# Altium PCB PCB1.PcbDoc
Units mil, origin at the board's own origin, x right, y up, seen from the top; angles counter-clockwise.
Board outline 3220 x 2140 mil, 2 copper layers (Top Layer, Bottom Layer); 27 components, 29 nets, 177 pads, 79 vias.
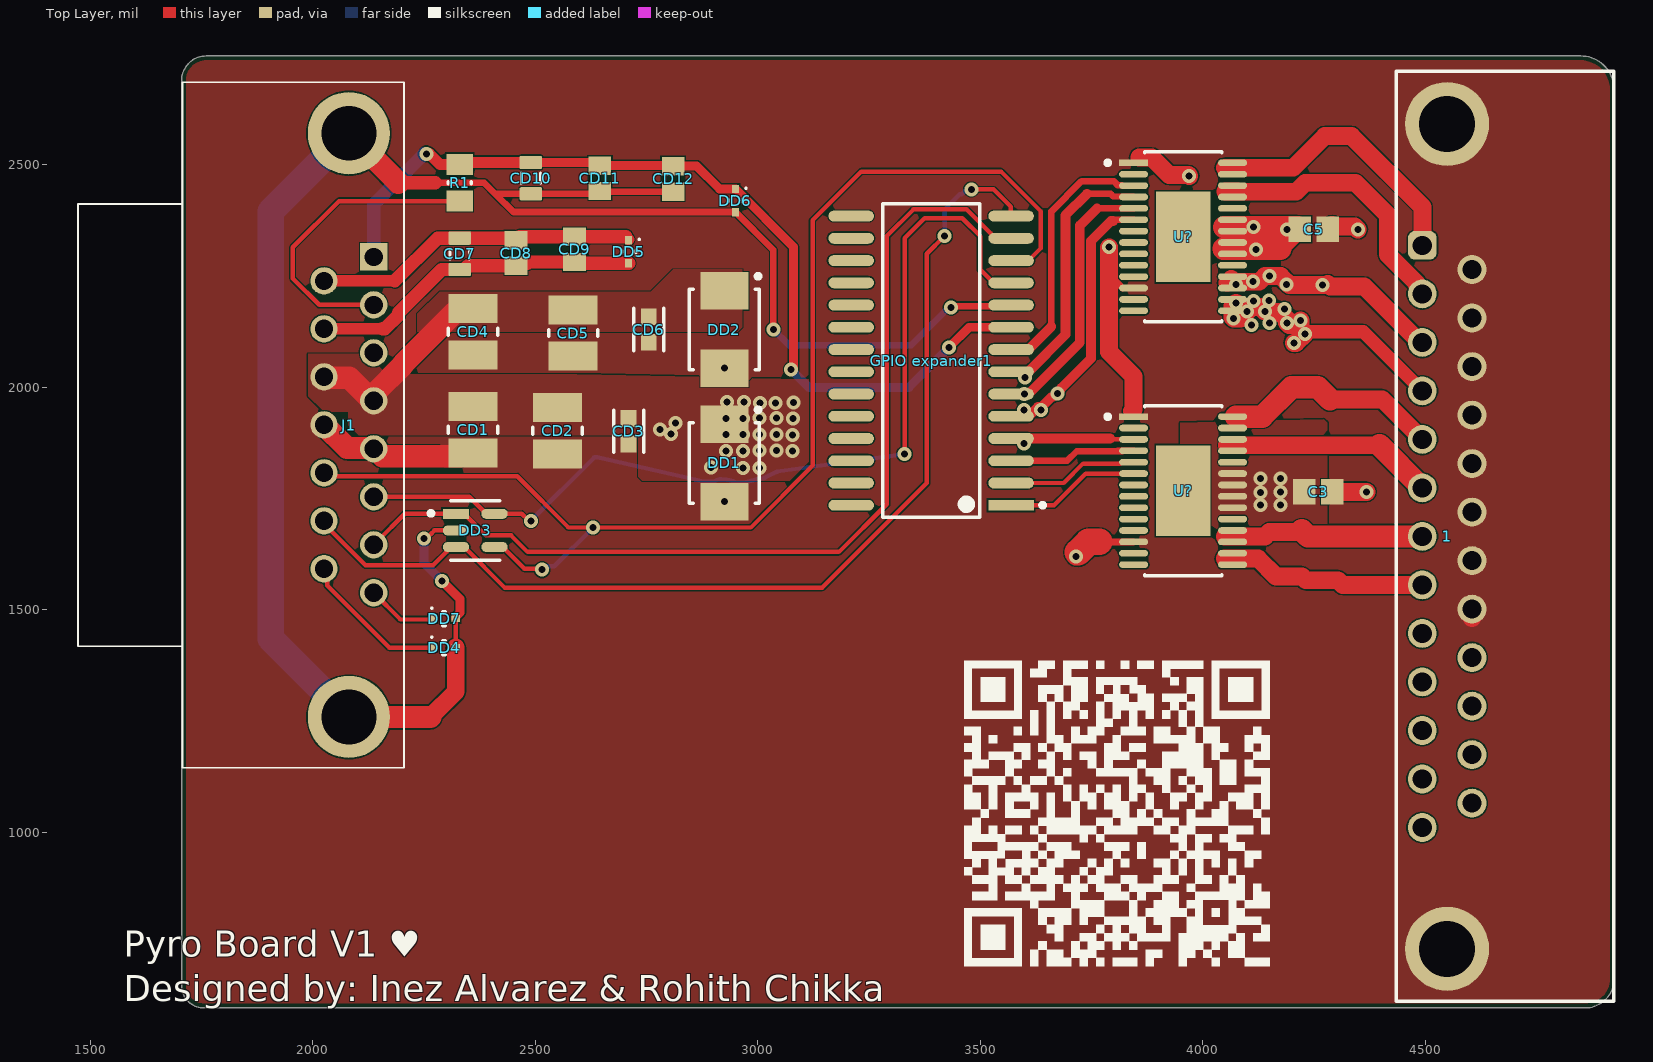
[diagram p0: Top Layer view]
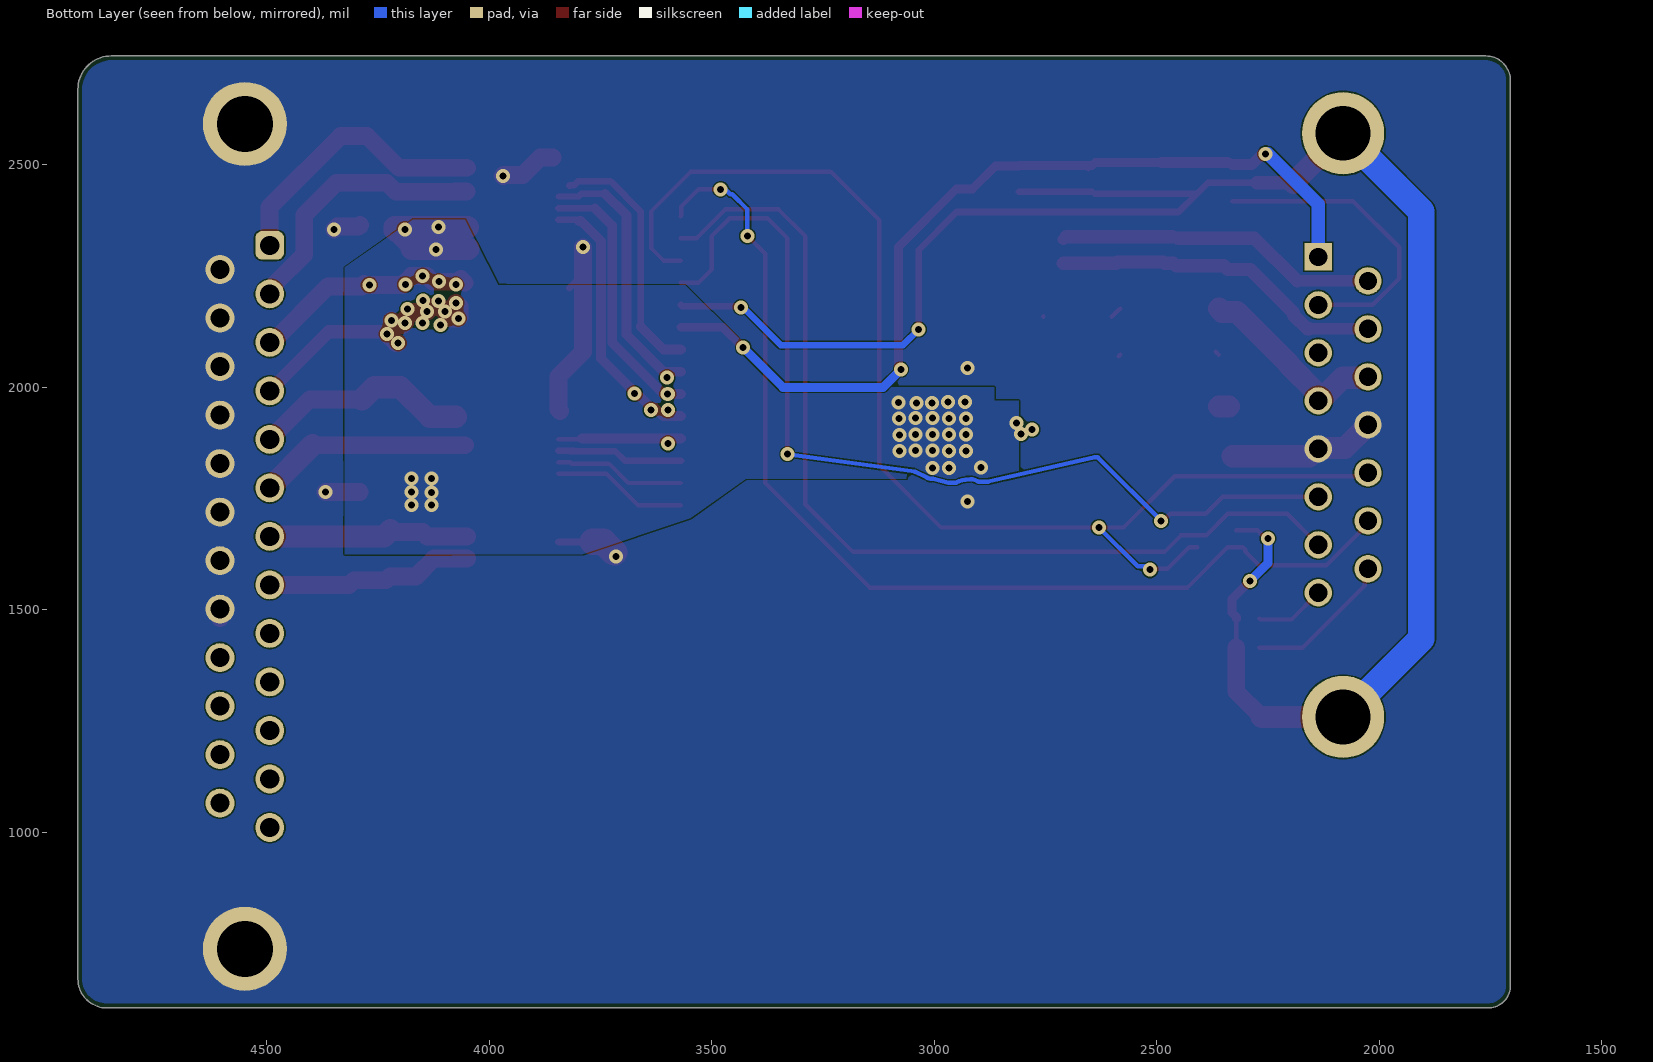
[diagram p1: Bottom Layer view, seen from below]
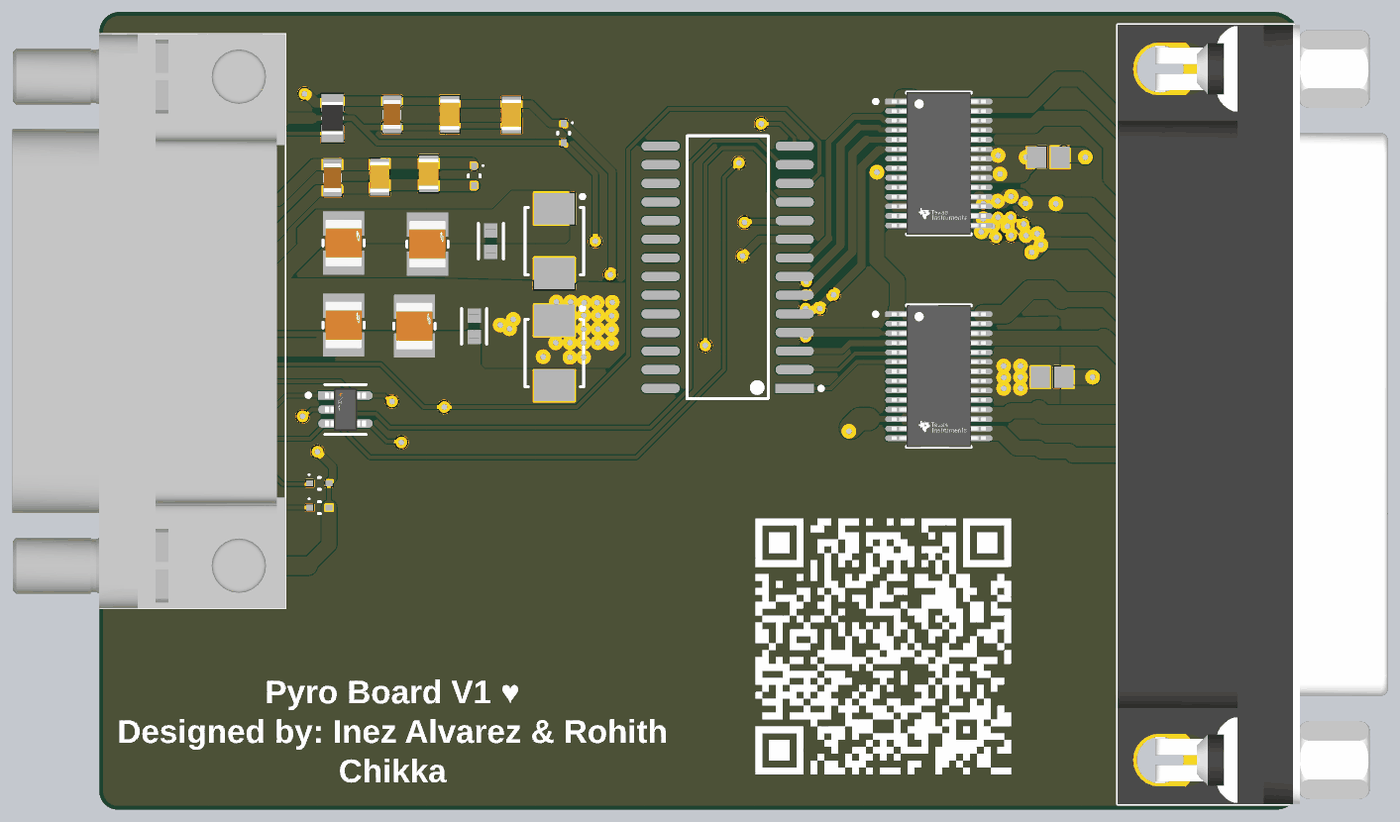
[diagram p2: 3D render of the assembled board from above, using the file's embedded part models]

## Layer stack, top to bottom
Top Solder: solder mask 0.4, Solder Resist, Dk 3.5
Top Layer: signal copper 1.4
Dielectric 1: dielectric 12.6, FR-4, Dk 4.8
Bottom Layer: signal copper 1.4
Bottom Solder: solder mask 0.4, Solder Resist, Dk 3.5

## Board outline
1705,655 ccw(c1755,655) 1755,605 4860,605 ccw(c4860,670) 4925,670 4925,2670 ccw(c4850,2670) 4850,2745 1760,2745 ccw(c1760,2690) 1705,2690

## Design rules (kind name [scope] priority, off if disabled: settings)
BoardOutlineClearance [All] p1: gap=10 ignorepadtopadclearanceinfootprint=FALSE except(0: Arc-SplitContinuation Track-SplitContinuation SMDPad-SplitContinuation THPad-SplitContinuation Via-SplitContinuation Fill-SplitContinuation Poly-SplitContinuation Region-SplitContinuation Text-SplitContinuation)
Clearance HVClearance [InNetClass('HV')] p1: gap=7.5 ignorepadtopadclearanceinfootprint=FALSE except(3: Arc-Text Track-Text SMDPad-Text THPad-Text Via-Text Fill-Text Poly-Text Region-Text Text-Text Text-Hole)
Clearance [All] p2: gap=3 ignorepadtopadclearanceinfootprint=FALSE
MinimumSolderMaskSliver [All] p1 off: minsoldermaskwidth=10
PolygonConnect [All] p1: connectstyle=Direct reliefconductorwidth=20 reliefentries=4 polygonreliefangle="90 Angle" airgapwidth=5
RoutingVias [All] p1: holewidth=28 width=50 viastyle="Through Hole" minholewidth=28 minwidth=50 maxholewidth=28 maxwidth=50 useviatemplates=TRUE
SilkToSolderMaskClearance [IsPad] p1 off: minsilkscreentomaskgap=10 clearancetoexposedcopper=TRUE
SolderMaskExpansion [All] p1: expansion=4 istentingtop=FALSE
SupplyNets "Schematic Supply Nets_1" [InNet('3V3GND')] p1: voltage=0.000
Width [All] p1: maxlimit=1000 minlimit=10 preferedwidth=20 minimp=50.000000 maximp=50.000000 favimp=50.000000
28 further rules are at their usual default settings.

## Classes and differential pairs
component class "Standard DSUB": CD1 CD2 CD3 CD4 CD5 CD6 CD7 CD8 CD9 CD10 CD11 CD12 DD1 DD2 DD3 DD4 DD5 DD6 DD7 DSUb J1 R1

## Components (designator, comment, footprint, x,y, rotation, side; value= is the part's Value field where it differs from the comment)
1 "618025231121" 618025231121 4679.69,1665 r90 top
C3 "1pf" CAPC2013X140X50NL20T25 4260,1765 r0 top
C5 "1pf" CAPC2013X140X50NL20T25 4249.69,2355 r0 top
CD1 "CL32B106KMVNNWE" FP-CL32-IPC_B 2360,1905 r270 top value=10µF
CD2 "CL32B106KMVNNWE" FP-CL32-IPC_B 2550,1902.18 r270 top value=10µF
CD3 "CL10B104KC8NNNC" FP-CL10-IPC_B 2710,1901.38 r270 top value=100nF
CD4 "CL32B106KMVNNWE" FP-CL32-IPC_B 2360,2125 r270 top value=10µF
CD5 "CL32B106KMVNNWE" FP-CL32-IPC_B 2585,2122.17 r270 top value=10µF
CD6 "CL10B104KC8NNNC" FP-CL10-IPC_B 2755,2130 r270 top value=100nF
CD7 "Capacitor 22µF +/-40% 16V 0805" CAPC0805(2012)145_L 2330,2300 r270 top value=22µF
CD8 "Capacitor 100 nF +/-10% 50 V 0805" CAPC2013X95X50LL10T25 2456.73,2301.71 r270 top value=100nF
CD9 "Capacitor 100 nF +/-10% 50 V 0805" CAPC2013X95X50LL10T25 2588.32,2310.24 r270 top value=100nF
CD10 "Capacitor 22µF +/-40% 16V 0805" CAPC0805(2012)145_L 2490,2470 r270 top value=22µF
CD11 "Capacitor 100 nF +/-10% 50 V 0805" CAPC2013X95X50LL10T25 2645,2470 r270 top value=100nF
CD12 "Capacitor 100 nF +/-10% 50 V 0805" CAPC2013X95X50LL10T25 2810,2468.54 r270 top value=100nF
DD1 "1SMB48AT3G" ONSC-SMB-2-403A-03_H_V 2925,1830 r270 top
DD2 "1SMB48AT3G" ONSC-SMB-2-403A-03_H_V 2925,2130 r270 top
DD3 "ESDS304DBVR" FP-DBV0005A-IPC_B 2365,1678.33 r0 top
DD4 "ESD5Z3.3T1G" ONSC-SOD-523-2-502-01_V 2295,1415 r0 top
DD5 "ESD5Z5.0T1G" ONSC-SOD-523-2-502-01_V 2710,2305 r270 top
DD6 "ESD5Z3.3T1G" ONSC-SOD-523-2-502-01_V 2950,2420 r270 top
DD7 "ESD5Z3.3T1G" ONSC-SOD-523-2-502-01_V 2295,1480 r0 top
"GPIO expander1" "MCP23S17T-E/SO" FP-C04-052-IPC_A 3389.74,2060 r180 top
J1 "5747236-6_1" 57472366 2136.81,2293.31 r90 top
R1 "Resistor 10k +/-1% 0805 125 mW" RESC2013X50X35ML15T15 2330,2460 r270 top value=10k
U? "TPS4H160AQPWPRQ1" FP-PWP0028C-IPC_B 3956.24,2338.39 r0 top (schematic designator MOSFET1)
U? "TPS4H160AQPWPRQ1" FP-PWP0028C-IPC_B 3956.24,1767.8 r0 top (schematic designator MOSFET2)

## Footprints (in the part's own frame and the unit in brackets; to place one, negate y for a bottom-side part, rotate by r counter-clockwise, add the part's x,y. Pads: shape width x height; smd on the part's side, far side on the other; paste and mask are expansions set on the pad)
57472366 [mm]
  rect 1.56x1.56 hole 1.04: 1(0,0)
  round 1.56 hole 1.04: 2(-2.74,0) 3(-5.48,0) 4(-8.22,0) 5(-10.96,0) 6(-13.7,0) 7(-16.44,0) 8(-19.18,0) 9(-1.37,2.84) 10(-4.11,2.84) 11(-6.85,2.84) 12(-9.59,2.84) 13(-12.33,2.84) 14(-15.07,2.84) 15(-17.81,2.84)
  round 4.695 hole 3.13: MH1(7.06,1.42) MH2(-26.27,1.42)
  silkscreen extent -29.17,-1.73 9.97,16.89, body extent -29.18,-1.72 9.98,16.88, height 12.49
618025231121 [mm] "25 pins, right angled, 8.08mm, with hex screw"
  rrect50% 1.65x1.65 hole 1.09: 1(16.62,4.72)
  round 1.65 hole 1.09: 2(13.85,4.72) 3(11.08,4.72) 4(8.31,4.72) 5(5.54,4.72) 6(2.77,4.72) 7(0,4.72) 8(-2.77,4.72) 9(-5.54,4.72) 10(-8.31,4.72) 11(-11.08,4.72) 12(-13.85,4.72) 13(-16.62,4.72) 14(15.235,1.88) 15(12.465,1.88) 16(9.695,1.88) 17(6.925,1.88) 18(4.155,1.88) 19(1.385,1.88) 20(-1.385,1.88) 21(-4.155,1.88) 22(-6.925,1.88) 23(-9.695,1.88) 24(-12.465,1.88) 25(-15.235,1.88)
  round 4.8 hole 3.2: M1(-23.55,3.3) M2(23.55,3.3)
  silkscreen extent -26.55,-6.2 26.55,6.2, body extent -26.55,-12.2 26.55,6.2, height 12.55
CAPC0805(2012)145_L [mm] "Chip Capacitor, Body 2.0x1.2mm, Height 1.45mm, IPC High Density"
  rrect25% 0.76x1.3 smd: 1(-0.9,0) 2(0.89,0)
  silkscreen extent -0.3,-0.55 0.3,0.55, body extent -1,-0.6 1,0.6, height 1.45
CAPC2013X95X50LL10T25 [mm] "Chip Capacitor, 2-Leads, Body 2.10x1.35mm, IPC High Density"
  rect 1.05x1.3 smd: 1(-0.725,0) 2(0.725,0)
  body extent -1.05,-0.67 1.05,0.67, height 0.95
CAPC2013X140X50NL20T25 [mm] "Chip Capacitor, 2-Leads, Body 2.00x1.25mm, IPC Medium Density"
  rect 1.3x1.45 smd: 1(-0.8,0) 2(0.8,0)
  body extent -1.1,-0.72 1.1,0.72, height 1.4
FP-C04-052-IPC_A [mil]
  rect 102.47x24.49 smd paste+0 mask+0: 1(-179.74,325)
  rrect100% 102.47x24.49 smd paste+0 mask+0: 2(-179.74,275) 3(-179.74,225) 4(-179.74,175) 5(-179.74,125) 6(-179.74,75) 7(-179.74,25) 8(-179.74,-25) 9(-179.74,-75) 10(-179.74,-125) 11(-179.74,-175) 12(-179.74,-225) 13(-179.74,-275) 14(-179.74,-325) 15(179.74,-325) 16(179.74,-275) 17(179.74,-225) 18(179.74,-175) 19(179.74,-125) 20(179.74,-75) 21(179.74,-25) 22(179.74,25) 23(179.74,75) 24(179.74,125) 25(179.74,175) 26(179.74,225) 27(179.74,275) 28(179.74,325)
  silkscreen extent -256,-352 109,352
FP-CL10-IPC_B [mil]
  rect 37.72x35.91 smd paste+0 mask+0: 1(-28.62,0) 2(28.62,0)
  silkscreen extent -47,-34 47,34, body extent -57,-28 57,28, height 10
FP-CL32-IPC_B [mil]
  rect 65.06x110.4 smd paste+0 mask+0: 1(-52.18,0) 2(52.17,0)
  silkscreen extent -8,-55 8,55, body extent -95,-65 95,65, height 10
FP-DBV0005A-IPC_B [mm]
  rect 1.505x0.572 smd paste+0 mask+0: 1(-1.1,0.95)
  rrect100% 1.505x0.572 smd paste+0 mask+0: 2(-1.1,0) 3(-1.1,-0.95) 4(1.1,-0.95) 5(1.1,0.95)
  silkscreen extent -2.65,-1.7 1.4,1.7, body extent -2.1,-1.7 2.1,1.7, height 0.25
FP-PWP0028C-IPC_B [mm]
  rect 1.655x0.381 smd paste+0 mask+0: 1(-2.825,4.225)
  rrect100% 1.655x0.381 smd paste+0 mask+0: 2(-2.825,3.575) 3(-2.825,2.925) 4(-2.825,2.275) 5(-2.825,1.625) 6(-2.825,0.975) 7(-2.825,0.325) 8(-2.825,-0.325) 9(-2.825,-0.975) 10(-2.825,-1.625) 11(-2.825,-2.275) 12(-2.825,-2.925) 13(-2.825,-3.575) 14(-2.825,-4.225) 15(2.825,-4.225) 16(2.825,-3.575) 17(2.825,-2.925) 18(2.825,-2.275) 19(2.825,-1.625) 20(2.825,-0.975) 21(2.825,-0.325) 22(2.825,0.325) 23(2.825,0.975) 24(2.825,1.625) 25(2.825,2.275) 26(2.825,2.925) 27(2.825,3.575) 28(2.825,4.225)
  rect 3.1x5.18 smd paste-1000 mask+0: 29(0,0)
  silkscreen extent -4.43,-4.85 2.2,4.85, body extent -3.9,-5.1 3.9,5.1, height 0.25
ONSC-SMB-2-403A-03_H_V [mil] "Molded, 2-Leads, Body 4.6x3.95mm"
  rect 85x107.99 smd: 1(-87.01,0) 2(87.01,0)
  silkscreen extent -125,-79 91,81, body extent -91,-78 91,78, height 95
ONSC-SOD-523-2-502-01_V [mm] "SOD, 2-Leads, Body 1.2x0.8mm"
  rect 0.48x0.4 smd: 1(-0.66,0) 2(0.66,0)
  silkscreen extent -0.75,-0.4 0.07,0.65, body extent -0.6,-0.4 0.6,0.4, height 0.7
RESC2013X50X35ML15T15 [mm] "Chip Resistor, 2-Leads, Body 2.2x1.4mm, IPC Low Density"
  rect 1.2x1.5 smd: 1(-1.05,0) 2(1.05,0)
  silkscreen extent -0.05,-0.65 0.05,0.65, body extent -1.1,-0.7 1.1,0.7, height 0.5

## Part data
1: library part CMP-1502-00202-2, Contact Resistance=30mΩ, Current Rating=3A, Insulation Resistance=5GΩ, Max Operating Temperature=105°C, Min Operating Temperature=-55°C, Operating Supply Voltage=125V, Contact Plating=Gold, Depth=18.5mm, Gender=Female, Housing Material=Steel, Insulation Material=PBT, Length=38.33mm, Mount="Through Hole", NexarPartId=18818207, Number Of Contacts=25, Number of Pins=25, Number of Rows=2, Orientation="Right Angle", Pitch=2.77mm, REACH SVHC=Unknown, RoHS=Compliant, Termination=SMD/SMT, Voltage Rating=125V, Width=12.5mm
C3 C5: library part CMP-2007-04531-1, Manufacturer="AVX Interconnect / Elco", Part Number=08051A181FAT2A
CD1 CD2 CD4 CD5: library part CMP-001-00107-1, "Ceramic Capacitor, Multilayer, Ceramic, 63V, 10% +Tol, 10% -Tol, X7R, 15% TC, 10uF, Surface Mount, 1210", Capacitor Type=Ceramic, Case/Package=1210, Max Operating Temperature=125°C, Min Operating Temperature=-55°C, Mounting Technology="Surface Mount", Pins=2, RoHS Compliant=Yes
CD3 CD6: library part CMP-001-00108-1, "Ceramic Capacitor, Multilayer, Ceramic, 100V, 10% +Tol, 10% -Tol, X7R, 15% TC, 0.1uF, Surface Mount, 0603", Capacitor Type=Ceramic, Case/Package=0603, Max Operating Temperature=125°C, Min Operating Temperature=-55°C, Mounting Technology="Surface Mount", Pins=2, RoHS Compliant=Yes
CD7 CD10: library part CMP-001-00081-4, "Chip Capacitor, 22µF +/-40%, 16V, 0805, Thickness 1.45 mm", Case/Package=0805, Max Operating Temperature=85°C, Min Operating Temperature=-55°C, Tolerance=5%, Voltage Rating=16V, Mounting Technology=SMT, Pins=2
CD8 CD9 CD11 CD12: library part CMP-001-00018-6, "Chip Capacitor, 100 nF, +/- 10%, 50 V, 0805 (2012 Metric)", Capacitor Type=Ceramic, Case/Package=0805, Max Operating Temperature=125°C, Min Operating Temperature=-55°C, Tolerance=10%, Voltage Rating=50V, Mounting Technology=SM, Pins=2, RoHS Compliant=True
DD1 DD2: library part CMP-004-00036-1, "Trans Voltage Suppressor Diode, 600W, 48V V(RWM), Unidirectional, 1 Element, Silicon, DO-214AA", Max Operating Temperature=150°C, Min Operating Temperature=-65°C, Pins=2, RoHS Compliant=Yes
DD3: library part CMP-004-00037-1, "Trans Voltage Suppressor Diode, 85W, 3.6V V(RWM), Unidirectional, 4 Element, Silicon", RoHS Compliant=Yes
DD4 DD6 DD7: library part CMP-004-00034-1, "Trans Voltage Suppressor Diode, 158W, 3.3V V(RWM), Unidirectional, 1 Element, Silicon", Max Operating Temperature=150°C, Min Operating Temperature=-55°C, Pins=2, RoHS Compliant=Yes
DD5: library part CMP-004-00035-1, "Trans Voltage Suppressor Diode, 240W, 5V V(RWM), Unidirectional, 1 Element, Silicon", Max Operating Temperature=150°C, Min Operating Temperature=-55°C, Pins=2, RoHS Compliant=Yes
"GPIO expander1": library part CMP-0186-00131-3, "IC I/O EXPANDER SPI 16B 28SOIC", Case/Package=SOIC, Frequency=10MHz, Max Operating Temperature=125°C, Max Supply Voltage=5.5V, Min Operating Temperature=-40°C, Min Supply Voltage=4.5V, Nominal Supply Current=1mA, Package Quantity=1600, Power Dissipation=700mW, Interface=SPI, Lead Free="Lead Free", Max Frequency=10MHz, Mount="Surface Mount", Number of Bits=16, Number of Channels=1, Number of I/Os=16, Number of Pins=28, Packaging="Tape and Reel", REACH SVHC="No SVHC"
J1: library part CMP-031-000002-4, "Male 15 pin DSUB, Used for Hotfire Modules - can connect to Hotfire main board", Arrow Part Number=5747236-6, Manufacturer_Name="TE Connectivity", Mouser Part Number=571-5747236-6, Arrow Price/Stock=https://www.arrow.com/en/products/5747236-6/te-connectivity, Datasheet Link=https://www.te.com/commerce/DocumentDelivery/DDEController?Action=srchrtrv&DocNm=82068_AMPLIMITE_Right-Angle_Posted_Conn&DocType=Catalog%20Section&DocLang=English&PartCntxt=5747236-6&DocFormat=pdf, Design Item ID=5747236-6_1, Height=12.93mm, Manufacturer_Part_Number=5747236-6, Mouser Price/Stock=https://www.mouser.co.uk/ProductDetail/TE-Connectivity/5747236-6?qs=2De2tSDgB03zVLI%252B5IT1Bw%3D%3D, Source=SamacSys.SchLib
R1: library part CMP-009-00018-5, "Chip Resistor, 10 KOhm, +/- 1%, 125 mW, -55 to 155 degC, 0805 (2012 Metric)", Case/Package=0805, Max Operating Temperature=155°C, Min Operating Temperature=-55°C, Power=125mW, Tolerance=1%, Voltage Rating=150V, Mounting Technology=SM, Pins=2, RoHS Compliant=True
U? U?: library part CMP-019-00059-1, "Buffer/Inverter Based Peripheral Driver, 2.5A, PDSO28", Case/Package=TSSOP, Max Operating Temperature=125°C, Max Supply Voltage=40V, Min Operating Temperature=-40°C, Min Supply Voltage=4V, Pins=28, RoHS Compliant=Yes

## Via types
v1: diameter 31.5, hole 15.75, Top Layer to Bottom Layer, 79 vias

## Nets (pads, with @x,y where several pads share a name; then routed paths per layer and width w, separated by ;. In a path a pad name is that pad's centre, name@x,y a point inside that pad or via, vN(x,y) a via of type N, cw(c..) or ccw(c..) an arc to the next point about the centre after c; other vN are vias at no path point)
3.3V: "GPIO expander1.9" CD10.1 CD11.1 CD12.1 DD6.1 J1.1 R1.1 | length 2045.5
  Top Layer w0: R1.1@2329.51,2501.34 2329.76,2501.09 R1.1
  Top Layer w10: CD11.1@2638.11,2505.43 CD11.1 CD11.1@2653.54,2490 ; CD12.1@2808.55,2498.54 2809.27,2497.82 CD12.1
  Top Layer w20: CD10.1 CD11.1@2638.11,2505.43 ; CD11.1 2653.54,2498.54 CD12.1@2808.55,2498.54 ; CD12.1@2809.27,2497.82 2862.18,2497.82 2914.02,2445.98 DD6.1 3080,2315.98 3080,2045 v1(3075,2040) ; v1(3430,2090) 3475,2135 3569.49,2135
  Top Layer w25: v1(2255,2525) 2261.76,2525 2285.67,2501.09 R1.1@2329.76,2501.09 ; R1.1@2340,2505.43 CD10.1
  Bottom Layer w10: v1@2250,2525 v1(2255,2525)
  Bottom Layer w20: v1(3075,2040) 3115,2000 3340,2000 v1(3430,2090)
  Bottom Layer w30: J1.1 2136.81,2411.81 v1@2250,2525
3V3GND: "GPIO expander1.10" CD10.2 CD11.2 CD12.2 DD3.2 DD4.2 DD6.2 DD7.2 J1.MH1 J1.MH2 | length 4394.7
  Top Layer w10: J1.MH1 J1.MH1@2114.36,2537.81 ; 2265,1670 2273.33,1678.33 DD3.2 ; DD4.2 DD7.2 ; CD11.2@2638.51,2434.96 CD11.2 CD11.2@2646.46,2440
  Top Layer w15: 2275,2460 2385,2460 2410.04,2434.96 ; CD11.2@2638.51,2434.96 CD10.2 2410.04,2434.96 ; CD11.2@2646.46,2440 CD12.2 ; v1(3035,2130) 3035,2309.02 DD6.2 2450.98,2394.02 2410.04,2434.96 ; v1(3435,2180) 3437.5,2182.5 3566.99,2182.5 3569.49,2185
  Top Layer w20: v1(2290,1565) 2330.98,1524.02 2330.98,1493.86 2320.98,1483.86 DD7.2
  Top Layer w30: 2192.17,2460 2275,2460
  Top Layer w40: 2264.06,1259.06 2320.98,1315.98 DD4.2
  Top Layer w50: J1.MH2 2264.06,1259.06 ; J1.MH1@2114.36,2537.81 2192.17,2460
  Bottom Layer w15: v1(3035,2130) 3070,2095 3345,2095 3430,2180 v1(3435,2180)
  Bottom Layer w20: v1(2250,1660) 2250,1605 v1(2290,1565)
  Bottom Layer w60: J1.MH2 1905,1434.96 1905,2395.35 J1.MH1
5V: CD7.1 CD8.1 CD9.1 DD5.1 J1.9 | length 734.6
  Top Layer w10: CD8.1@2451.55,2335.43 CD8.1 CD8.1@2465.26,2338.79 ; DD5.1 DD5.1@2710,2332.56
  Top Layer w25: DD5.1@2703.77,2338.79 DD5.1@2710,2332.56
  Top Layer w26: J1.9 2184.37,2239.37
  Top Layer w30: 2184.37,2239.37 2280.43,2335.43 CD7.1 CD8.1@2451.55,2335.43 ; CD8.1@2465.26,2338.79 CD9.1 DD5.1@2703.77,2338.79
5VGND: CD7.2 CD8.2 CD9.2 DD5.2 J1.10 | length 751.4
  Top Layer w10: CD9.2 CD9.2@2591,2279.02
  Top Layer w26: J1.10 2156.5,2131.5
  Top Layer w30: 2156.5,2131.5 2161.66,2131.5 2192.52,2162.36 2192.52,2167.52 2289.96,2264.96 CD7.2 2340.55,2264.96 2348.76,2273.17 CD8.2 2462.4,2278.84 2482.03,2278.84 2484.89,2281.7 CD9.2 ; CD9.2@2591,2279.02 DD5.2
CLK: "GPIO expander1.12" DD3.4 J1.13 | length 2796.9
  Top Layer w10: J1.13 2032.87,1800 2459.55,1800 2574.55,1685 v1(2630,1685) 2984.72,1685 3123.3,1823.58 3123.3,2375.82 3232.48,2485 3547.01,2485 3635.72,2396.29 3635.72,2312.25 3608.48,2285 3569.49,2285 ; DD3.4 2426.69,1640.92 2475,1592.62 2512.38,1592.62 v1(2515,1590)
  Bottom Layer w10: v1(2515,1590) 2522.65,1597.65 2542.65,1597.65 v1(2630,1685)
CS: "GPIO expander1.11" DD3.5 J1.6 | length 2118.7
  Top Layer w10: J1.6 2351.75,1753.94 2389.96,1715.73 DD3.5 2469.27,1715.73 2475,1710 ; v1(3330,1850) 3330,2335 3375,2380 3460,2380 3500,2340 3500,2265 3530,2235 3569.49,2235
  Bottom Layer w10: v1(2490,1700) 2629.72,1839.72 2632.65,1842.65 2639.87,1842.65 2878.89,1788.19 2901.11,1788.19 2913.94,1793.84 2918.56,1793.84 2929.77,1792.76 cw(c2925,1742.99) 2950.85,1785.79 2968.58,1785.79 3002.72,1794.45 ccw(c3004.88,1819.22) 3015.92,1796.94 3043.83,1810.74 v1(3330,1850)
GPIO1: DD4.1 J1.15 | length 335.2
  Top Layer w10: J1.15 2032.12,1585.01 2032.12,1554.6 2171.72,1415 DD4.1
GPIO2: DD7.1 J1.8 | length 157.8
  Top Layer w10: J1.8 2196.81,1478.19 2267.21,1478.19 DD7.1
HPGROUND: 1.14 1.15 1.16 1.17 1.18 1.19 1.20 1.21 1.M1 1.M2 C3.2 C5.2 CD1.2 CD2.2 CD3.2 CD4.2 CD5.2 CD6.2 DD1.2 DD2.2 J1.5 J1.12 U?.1 U?.12 | length 1299.3
  Top Layer w10: J1.5@2135.07,1863.56 J1.5 ; CD4.2 CD4.2@2367.17,2080 ; CD5.2@2582.17,2072.83 CD5.2
  Top Layer w15: v1(3790,2315) 3790,2310.54 3801.91,2298.62 3801.91,2266.96 3801.91,2256.27 ; 3801.91,2241.36 3801.91,2241.23 U?.12@3819.91,2223.23 ; C5.2 C5.2@4291.18,2365
  Top Layer w16: 3767.64,1652.64 U?.12@3845,1652.64
  Top Layer w40: J1.12 J1.12@2030.8,1915.75 ; v1(3715,1620) 3715,1622.71 3720,1627.71 v1@3720,1629.21 ; v1(3790,2315) 3789.41,2314.41 3789.41,2261.45 3789.41,2080.14 3845,2024.55 3845,1950 3841.25,1946.25 ; 3857.59,2516.63 3885.62,2516.63 3924.98,2477.27 3968.09,2477.27 v1(3970,2475.35) ; C5.2@4291.18,2365 4294.48,2361.7 4342.23,2361.7 v1(4348.93,2355) ; C3.2 v1(4368.5,1765) ; 1.14@4605,2265.47 1.14 ; 1.21@4605.67,1480.72 1.21
  Top Layer w50: J1.12 2077.19,1863.56 J1.5@2135.07,1863.56 ; J1.5 2139.9,1861.81 2156.71,1845 CD1.2@2329.51,1845
  Top Layer w60: v1@3720,1629.21 3743.43,1652.64 3767.64,1652.64
  Bottom Layer w40: J1.5 J1.5@2142.61,1861.81 ; 1.14@4600.91,2260.05 1.14
  other v1: 2925,1742.99 2925,2042.99
HPVOLTAGE: C3.1 C5.1 CD1.1 CD2.1 CD3.1 CD4.1 CD5.1 CD6.1 DD1.1 DD2.1 J1.4 J1.11 U?.20 U?.21 U?.22 U?.23 | length 866.3
  Top Layer w10: CD5.1@2582.17,2177.18 CD5.1 CD5.1@2600.73,2158.62 ; CD6.1 CD6.1@2755,2159.53
  Top Layer w39: 4174.63,2311.44 4209.15,2345.96 4212.1,2345.96 4218.19,2352.05 C5.1 C5.1@4213.19,2360
  Top Layer w50: J1.11 2027.18,2021.44 2081.97,2021.44 2133.72,1969.69 J1.4 ; J1.4@2137.12,1969.69 J1.4 ; CD1.1@2337.33,1957.18 CD1.1 ; CD4.1 2352.47,2169.64 2319.59,2169.64 2202.52,2052.58 2202.52,2050.34 2139,1986.82 2139,1971.87 J1.4 ; 4046.8,2311.44 4174.63,2311.44 ; 4048.56,2360 4067.47,2360 v1(4115,2360) C5.1@4213.19,2360
  other v1: 4130,1735 4175,1735 4130.24,1763.99 4175,1765 4130,1795 4175,1795 2966.93,1818.31 3003.54,1818.7 2895,1820 3078.35,1856.5 2928.74,1857.28 2966.93,1857.28 3003.54,1857.68 3041.73,1857.68 3078.35,1893.11 2928.74,1893.9 2966.93,1893.9 3003.54,1894.29 3041.73,1894.29 2805,1895 2780,1905 2815,1920 3078.74,1929.72 2929.13,1930.51 2967.32,1930.51 3003.94,1930.91 3042.13,1930.91 3005,1965 3040,1965 3080.32,1965.94 2930.71,1966.73 2968.9,1966.73 4120,2310 4190,2355
"MAIN F": "GPIO expander1.4" U?.3@3845,1882.95 | length 276.4
  Top Layer w10: 3792.41,1885 3794.46,1882.95 U?.3@3845,1882.95
  Top Layer w22: 3569.49,1885 3792.41,1885
  other v1: 3598.74,1873.31
"MAIN F O": 1.5 U?.27@4067.47,1908.54 U?.28@4067.47,1934.13 | length 494.5
  Top Layer w40: 4286.18,1972.95 4404.02,1972.95 1.5
  Top Layer w50: U?.28@4075.06,1934.06 4134.06,1934.06 4200,2000 4259.13,2000 4286.18,1972.95
"MAIN O": "GPIO expander1.3" U?.4@3845,1857.36 | length 284.8
  Top Layer w15: 3569.49,1835 3695.59,1835 3717.09,1856.5 3809.29,1856.5 3809.55,1856.77 3819.32,1856.77 3819.92,1857.36 U?.4@3845,1857.36
"MAIN O O": 1.6 U?.25@4067.47,1857.36 U?.26@4067.47,1882.95 | length 480.8
  Top Layer w15: U?.25@4067.47,1857.36 U?.25@4069.7,1857.36
  Top Layer w40: 4055,1870 4223.19,1870 4397.91,1870
  Top Layer w50: 4397.91,1870 1.6
MISO: "GPIO expander1.14" DD3.3 J1.14 | length 2397.9
  Top Layer w10: J1.14 2025,1693.23 2118.23,1600 2270,1600 2300.91,1630.91 2300.91,1635.14 2306.7,1640.92 DD3.3 2340.04,1640.92 2430.97,1550 3145,1550 3380,1785 3380,2300 v1(3420,2340) ; v1(3480,2445) 3530,2445 3568.61,2406.39 3568.61,2385.88 3569.49,2385
  Bottom Layer w10: v1@3413.43,2340 v1(3420,2340) 3420,2400 3454.22,2434.22 3458.39,2434.22 3469.18,2445 v1(3480,2445)
MOSI: "GPIO expander1.13" DD3.1 J1.7 | length 2185.9
  Top Layer w10: J1.7@2144.12,1653.37 2206.48,1715.73 2340.04,1715.73 2388.58,1667.19 2445.45,1667.19 2482.64,1630 3182.52,1630 3290,1737.48 3290,2340 3350,2400 3470,2400 3523.48,2346.52 3523.48,2345.94 3534.42,2335 3569.49,2335
MOV: "GPIO expander1.2" U?.5@3845,1831.77 | length 294.9
  Top Layer w10: 3569.49,1785 3687.68,1785 3731.35,1828.68 3815.46,1828.68 3818.56,1831.77 U?.5@3845,1831.77
"MOV O": 1.7 U?.17@4067.47,1652.64 U?.18@4067.47,1678.23 | length 456.5
  Top Layer w10: 4221.13,1677.06 4223.19,1675
  Top Layer w40: 4050,1665 4067.47,1665 4140,1665 4150,1675 4223.19,1675
  Top Layer w50: 4223.19,1678.54 4236.73,1665 1.7
PYRO: "GPIO expander1.1" U?.6@3845,1806.18 | length 305
  Top Layer w10: 3569.49,1735 3665.96,1735 3737.14,1806.18 U?.6@3845,1806.18
"PYRO O": 1.8 U?.15@4067.47,1601.46 U?.16@4067.47,1627.05 | length 456.9
  Top Layer w15: U?.16@4066.99,1626.57 U?.16@4067.47,1627.05
  Top Layer w40: 4050,1615 4125,1615 4165,1575 4223.19,1575 ; 4231.73,1566.46 4304.69,1566.46 4315.2,1555.94 1.8
SENSE: J1.2 R1.2 | length 694.6
  Top Layer w10: J1.2 2014.29,2185.43 1955,2244.73 1955,2315 2058.66,2418.66 R1.2
"SOL FV 1": "GPIO expander1.8" U?.3@3845,2453.54 | length 562.9
  Top Layer w15: 3660,2136.52 3660,2395.3 3728.2,2463.5 3800.19,2463.5 3809.55,2454.14 3819.32,2454.14 U?.3@3819.91,2453.55
  Top Layer w22: 3569.49,2085 3608.48,2085 3660,2136.52
"SOL FV 1 O": 1.1 U?.27@4067.47,2479.13 U?.28@4067.47,2504.72 | length 626
  Top Layer w40: 4050,2493.8 4067.47,2493.8 4203.8,2493.8 4274.73,2564.73 4334.9,2564.73 4494.43,2405.2 4494.43,2331.81 4493.86,2331.24 1.1
"SOL FV 2": "GPIO expander1.7" U?.4@3845,2427.95 | length 601.4
  Top Layer w10: 3795.11,2433.23 3799.43,2428.91 ; U?.4@3844.05,2428.91 U?.4@3845,2427.95
  Top Layer w14: 3799.43,2428.91 U?.4@3844.05,2428.91
  Top Layer w15: 3740,2435 3793.34,2435 3795.11,2433.23
  Top Layer w22: 3569.49,2035 3608.48,2035 3692,2118.52 3692,2387 3740,2435
  other v1: 3600.71,2021.73
"SOL FV 2 O": 1.2 U?.25@4067.47,2427.95 U?.26@4067.47,2453.54 | length 612.8
  Top Layer w40: 4051.28,2440 4078.72,2440 4078.86,2439.86 4210.67,2439.86 4230.81,2460 4343.78,2460 4416.43,2387.35 4416.43,2298.88 4481.38,2233.94 4481.38,2229.51 4493.86,2217.03 1.2
"SOL OV 1": "GPIO expander1.6" U?.5@3845,2402.36 | length 602.7
  Top Layer w15: 3762.36,2402.36 U?.5@3845,2402.36
  Top Layer w22: 3569.49,1985 3608.48,1985 3724,2100.52 3724,2364 3762.36,2402.36
  other v1: 3599.13,1985.51
"SOL OV 1 O": 1.3 U?.17@4067.47,2223.23 U?.18@4067.47,2248.82 | length 472.3
  Top Layer w40: 4055.57,2235.13 U?.18@4064.35,2243.91 ; v1@4080.06,2237.45 4127.56,2237.45 4140.11,2250 4175.58,2250 4195.58,2230 v1(4270,2230) ; v1@4281.18,2232.05 4286.77,2226.46 4363.54,2226.46 1.3@4485,2105
  other v1: 4075.67,2230.67 4188.66,2231.06 4113.86,2237.45 4150,2250
"SOL OV 2": "GPIO expander1.5" U?.6@3845,2376.77 | length 616.1
  Top Layer w15: 3799.13,2373.86 3802.03,2376.77 U?.6@3845,2376.77
  Top Layer w22: 3569.49,1935 3570.3,1935.81 3609.29,1935.81 3629.65,1956.17 3638.36,1956.17 3661.22,1979.04 3664.5,1979.04 3670.84,1985.37 3670.84,1989.01 3674.47,1989.01 3682.38,1996.92 3682.38,1998.23 3749,2064.85 3749,2329 3793.86,2373.86 3799.13,2373.86
  other v1: 3598.74,1948.9 3636.93,1948.9 3673.94,1985.91
"SOL OV 2 O": 1.4 U?.15@4067.47,2172.05 U?.16@4067.47,2197.64 | length 663.8
  Top Layer w30: 4281.18,2125 4225,2125 4225.21,2124.79 4361.23,2124.79 1.4
  Top Layer w40: v1(4075,2190) 4067.47,2182.47 4067.47,2172.05 4067.47,2157.53 v1(4070,2155) 4085,2155 v1(4100,2170) 4110.83,2180.83 4129.17,2180.83 v1(4140,2170) 4173.19,2170 4175.39,2167.8 4190,2153.19 v1(4190,2145) 4195,2140 v1@4210,2140 ; v1(4205,2100) 4210,2100 v1(4230,2120) v1@4225.21,2124.79 ; 4215,2135 v1@4215,2140 ; v1(4220,2150) 4220,2130 v1@4225,2125
  other v1: 4110,2140 4150,2145 4183.66,2176.06 4115,2193.91 4148.9,2194.84
pads on no net: 1.9 1.10 1.11 1.12 1.13 1.22 1.23 1.24 1.25 "GPIO expander1.15" "GPIO expander1.16" "GPIO expander1.17" "GPIO expander1.18" "GPIO expander1.19" "GPIO expander1.20" "GPIO expander1.21" "GPIO expander1.22" "GPIO expander1.23" "GPIO expander1.24" "GPIO expander1.25" "GPIO expander1.26" "GPIO expander1.27" "GPIO expander1.28" J1.3 U?.2 U?.7 U?.8 U?.9 U?.10 U?.11 U?.13 U?.14 U?.19 U?.24 U?.29

## Polygon pours and split planes (outlines as drawn)
HPGROUND on Bottom Layer "HPGROUND_L02_P023" (solid, pour order 23): 1684.11,2885.22 1684.11,2785.08 1629.11,2730.08 1629.11,590.08 1782.62,537.58 4891.61,537.58 5173.8,927.52 5030.25,2890.66
HPVOLTAGE on Bottom Layer "HPVOLTAGE_L02_P001" (solid, pour order 1): 2865,2000 2865,1885 3295,1885 3548.33,1705.56 3790,1625 4325,1625 4325,2270 4172.36,2376.85 4055,2376.85 3980,2230 3560,2230 3330,2000
HPVOLTAGE on Bottom Layer "HPVOLTAGE_L02_P011" (solid, pour order 11): 2810,1795 3510,1795 3510,1810 3350,1970 2810,1970
HPGROUND on Bottom Layer "HPGROUND_L02_P020" (solid, pour order 20): 4540,1845 4585,1890 4660,1890 4690,1860 4690,1780 4670,1760 4555,1760 4500,1705 4335,1705 4290,1750 4290,1800 4330,1835 4355,1845 4325,1845 4355,1845
HPGROUND on Bottom Layer "HPGROUND_L02_P013" (solid, pour order 13): 2875,1995 2875,2165 3245,2535 4465,2535 4670,2330 4670,2215 4270,2215 4205,2400 4200,2395 4010,2395 3985,2265 3895,2145 3850,2100 3845,2105 3370,2105 3270,2005 2880,2005
HPGROUND on Bottom Layer "HPGROUND_L02_P015" (solid, pour order 15): 2095,1920 2150,1920 2325,2095 2405,2095 2405,1930 2295,1820 2100,1820 2100,1835 2095,1840
HPGROUND on Bottom Layer "HPGROUND_L02_P007" (solid, pour order 7): 2830,1790 3915,1790 4125,1580 4730,1580 4730,1330 4725,1335 2845,1335 2825,1355 2830,1360
HPVOLTAGE on Top Layer "HPVOLTAGE_L01_P016" (solid, pour order 16): 2740,1790 2730.96,1799.04 2730.96,1891.8 2103.2,1891.8 2080,1915 2080,1945 2025,1945 1990,1980 1990,2075 2120,2075 2165,2030 2180,2030 2592.76,2030 3117.5,2018.09 3117.5,1835 3072.5,1790
HPGROUND on Top Layer "HPGROUND_L01_P026" (solid, pour order 26): 1593.65,2786.62 1593.65,502.84 1787.44,309.04 2070.79,592.39 5180.79,592.39 5230.79,642.39 5225.79,647.39 5225.79,2845
HPVOLTAGE on Top Layer "HPVOLTAGE_L01_P010" (solid, pour order 10): 3950,1920.78 3950,1631.91 4280,1631.91 4280,1928.11
HPGROUND on Top Layer "HPGROUND_L01_P018" (solid, pour order 18): 2290,1825.22 2285.01,1900 2305,1900 2725,1900 2845,1780 2990,1780 2990,1700 2985,1695 2595,1695 2470,1820 2294.99,1820 2294.99,1825.22
HPGROUND on Top Layer "HPGROUND_L01_P021" (solid, pour order 21): 2985,2000 2985,2120 2325,2120 2205,2000
HPVOLTAGE on Top Layer "HPVOLTAGE_L01_P019" (solid, pour order 19): 2965,2265 2810,2265 2760,2215 2285,2215 2235,2165 2235,2125 2955,2125 2965,2135
HPGROUND on Top Layer "HPGROUND_L01_P014" (solid, pour order 14): 4630,2695 4720,2605 4720,695 4660,635 4445,635 4445,890 4545,990 4545,2410 4450,2505 4450,2695

## Silkscreen, mask and mechanical layers (free items; w line width, h text height)
Top Overlay:
  drawing of 102 lines, arcs and shapes, not listed
  text "Pyro Board V1 ♥ / Designed by: Inez Alvarez & Rohith Chikka" at 1575,601 h100
Mechanical 1:
  lines w10: 1705,1095 1705,1105 ; 1705,655 ccw(c1755,655) 1755,605 4860,605 ccw(c4860,670) 4925,670 4925,2670 ccw(c4850,2670) 4850,2745 1760,2745 ccw(c1760,2690) 1705,2690 1705,655

## Text inside footprints (layer, text, board x,y; h text height)
1: Top 3D Body "PCB Edge" at 4976.93,1680.75 h40 r90